# EAGLE board RMXU_V11 (EAGLE 6.2)
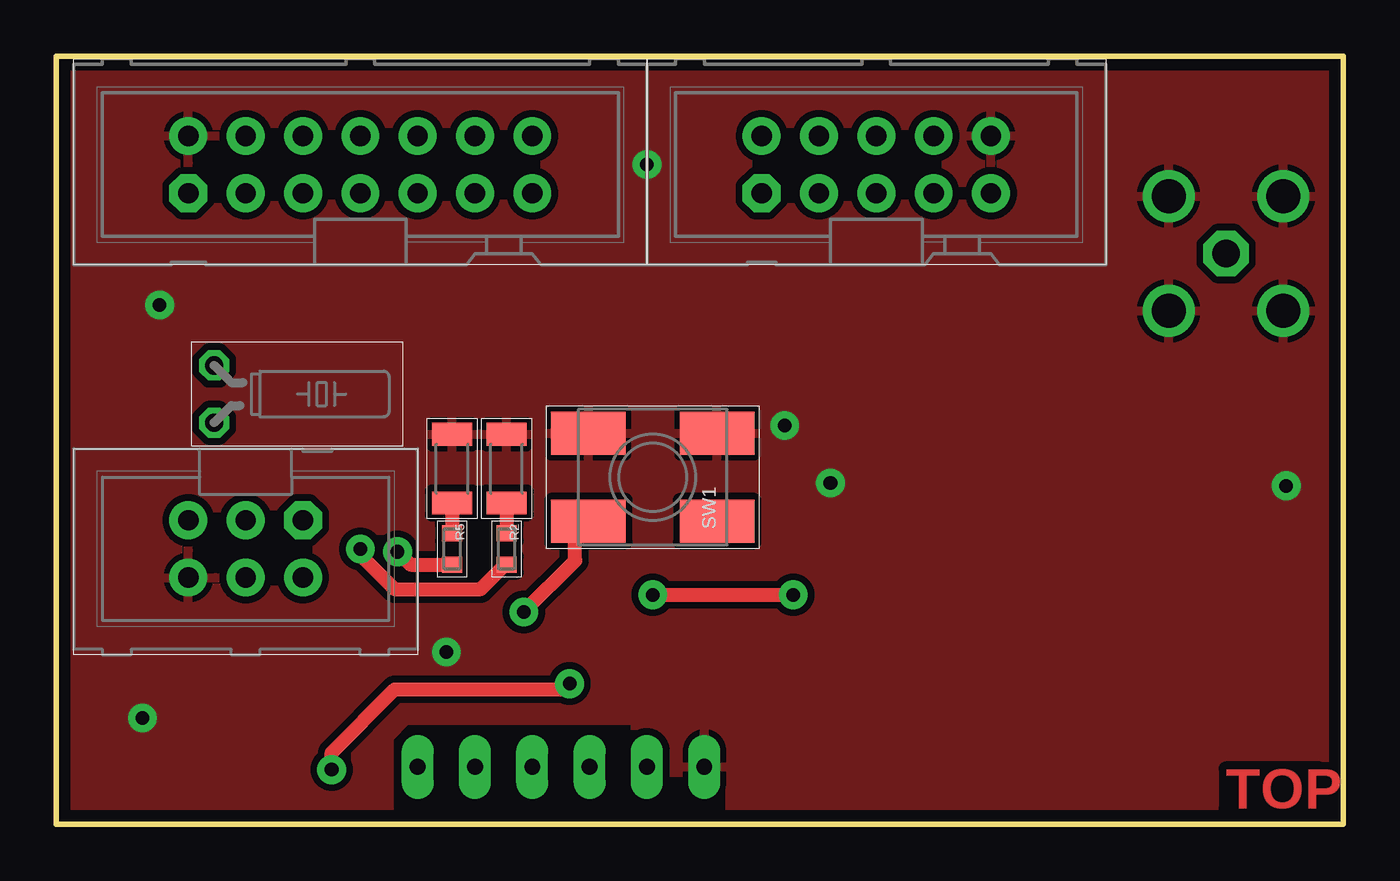
[diagram p0: board, top side]
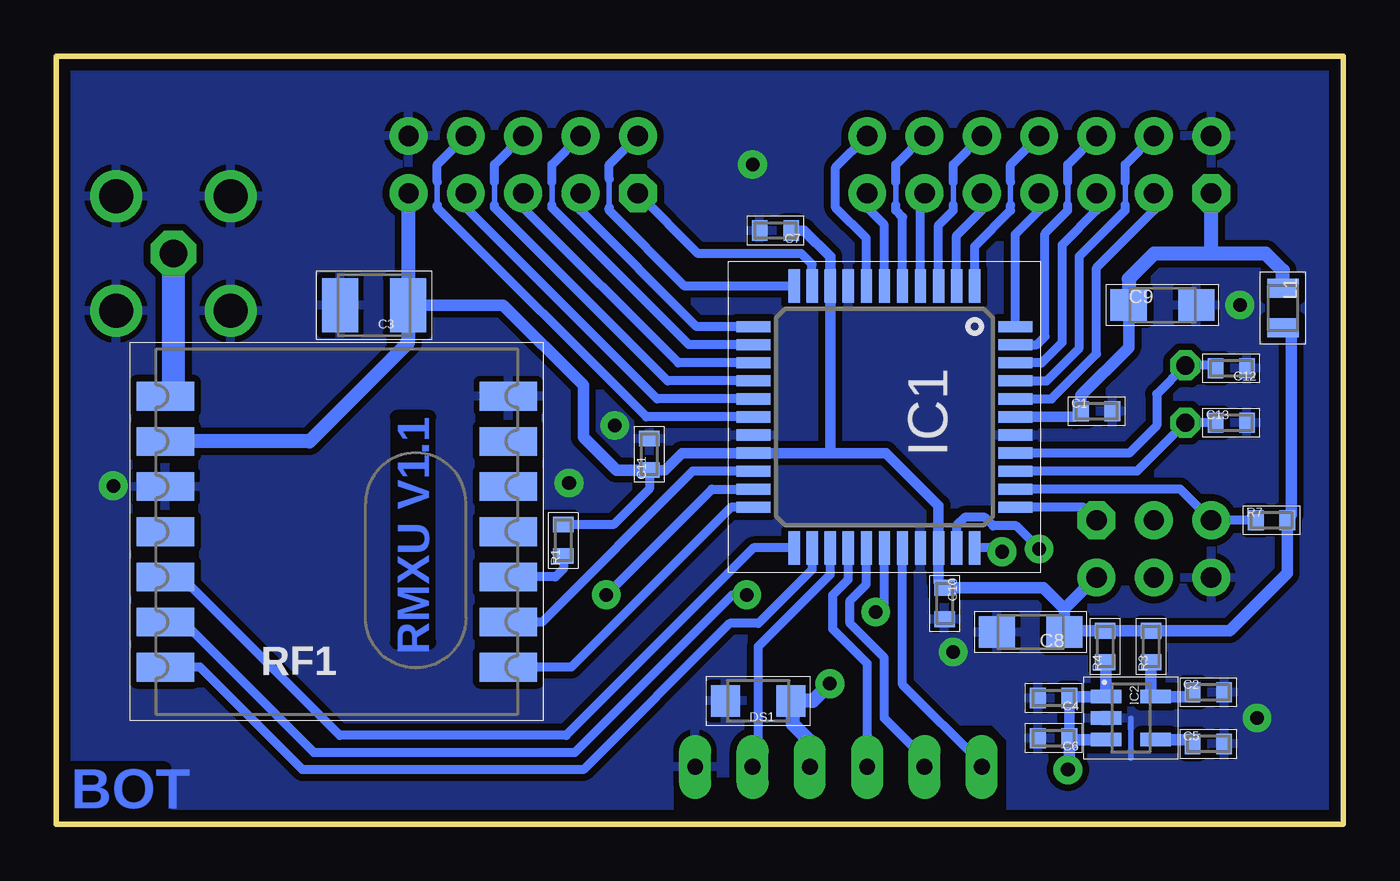
[diagram p1: board, bottom side, seen from below]

Size 57 x 34 mm. Coordinates in mm from the lower left corner, seen from the top.
Outline: 57,34 57,0 0,0 0,34 57,34
Copper layers (1+16): Top 0.035mm / dielectric 1.5mm / Bottom 0.035mm
Design rules: minimum track width 9mil, minimum drill 15mil, track to track 12mil, track to pad 12mil, pad to pad 10mil, via to via 12mil, smd to smd 10mil, copper to edge 20mil, drill to drill 8mil, minimum pad ring 10mil, minimum via ring 8mil, stop-mask expansion 4mil, vias tented up to drill 0mil, thermal gap 10mil

## Footprints (pad centres in the part's own frame; a part is rotated, then mirrored left to right if it is on the bottom)
0603 = smd 0.7 x 0.9: 1 -0.697,0; 2 0.697,0
SMC_B = smd 1.6 x 2.4: + -1.5,0; - 1.5,0
SMC_A = smd 1.6 x 1.4: + -1.5,0; - 1.5,0
SMF = smd 1.3 x 1.4: A 1.45,0; C -1.45,0
TQFP44 = smd 1.5 x 0.5: 1 -5.8,4; 2 -5.8,3.2; 3 -5.8,2.4; 4 -5.8,1.6; 5 -5.8,0.8; 6 -5.8,0; 7 -5.8,-0.8; 8 -5.8,-1.6; 9 -5.8,-2.4; 10 -5.8,-3.2; 11 -5.8,-4; 23 5.8,-4; 24 5.8,-3.2; 25 5.8,-2.4; 26 5.8,-1.6; 27 5.8,-0.8; 28 5.8,0; 29 5.8,0.8; 30 5.8,1.6; 31 5.8,2.4; 32 5.8,3.2; 33 5.8,4 | smd 0.5 x 1.5: 12 -4,-5.8; 13 -3.2,-5.8; 14 -2.4,-5.8; 15 -1.6,-5.8; 16 -0.8,-5.8; 17 0,-5.8; 18 0.8,-5.8; 19 1.6,-5.8; 20 2.4,-5.8; 21 3.2,-5.8; 22 4,-5.8; 34 4,5.8; 35 3.2,5.8; 36 2.4,5.8; 37 1.6,5.8; 38 0.8,5.8; 39 0,5.8; 40 -0.8,5.8; 41 -1.6,5.8; 42 -2.4,5.8; 43 -3.2,5.8; 44 -4,5.8
SOT23-5 = smd 0.6 x 1.35: 1 -0.95,-1.101; 2 0,-1.101; 3 0.95,-1.101; 4 0.95,1.101; 5 -0.951,1.101
0805 = smd 0.85 x 1.4: 1 -0.88,0; 2 0.88,0
1206 = smd 1.016 x 1.778: 1 -1.524,0; 2 1.524,0
TC26H = drill 0.813 octagon: 1 -1.27,0; 2 1.27,0
RFM12B = smd 2.54 x 1.27: /RES -7.6,-4; ANT 7.6,-6; CFIL -7.6,0; CLK -7.6,-2; FFS -7.6,2; GND 7.6,-2; GND@1 -7.6,-6; INT 7.6,0; IRQ -7.6,4; SCK 7.6,4; SDI 7.6,2; SDO -7.6,6; SEL 7.6,6; VDD 7.6,-4
ML6 = drill 0.9 pad 1.676 octagon: 1 -2.54,-1.27 | drill 0.9 pad 1.676: 2 -2.54,1.27; 3 0,-1.27; 4 0,1.27; 5 2.54,-1.27; 6 2.54,1.27
ML10 = drill 0.9 pad 1.676 octagon: 1 -5.08,-1.27 | drill 0.9 pad 1.676: 2 -5.08,1.27; 3 -2.54,-1.27; 4 -2.54,1.27; 5 0,-1.27; 6 0,1.27; 7 2.54,-1.27; 8 2.54,1.27; 9 5.08,-1.27; 10 5.08,1.27
ML14 = drill 0.9 pad 1.676 octagon: 1 -7.62,-1.27 | drill 0.9 pad 1.676: 2 -7.62,1.27; 3 -5.08,-1.27; 4 -5.08,1.27; 5 -2.54,-1.27; 6 -2.54,1.27; 7 0,-1.27; 8 0,1.27; 9 2.54,-1.27; 10 2.54,1.27; 11 5.08,-1.27; 12 5.08,1.27; 13 7.62,-1.27; 14 7.62,1.27
SPNO = smd 3.3 x 1.9: 1 -2.85,1.95; 2 2.85,1.95; 3 -2.85,-1.95; 4 2.85,-1.95
T2.0/1.2 = drill 1.2 pad 2 octagon: P$1 0,0
T2.3/1.5 = drill 1.5 pad 2.3: P$1 0,0
T1.4/0.7L = drill 0.7 pad 1.422 long: 1 0,0

## Placement (x,y rotation side)
C1  100n  [0603]  10.92,18.29 0 bottom
C2  1u  [0603]  5.97,5.84 0 bottom
C3  68u  [SMC_B]  42.93,22.99 180 bottom
C4  1u  [0603]  12.83,5.59 180 bottom
C5  10n  [0603]  5.97,3.56 0 bottom
C6  100n  [0603]  12.83,3.81 180 bottom
C7  100n  [0603]  25.15,26.29 180 bottom
C8  10u  [SMC_A]  13.84,8.51 180 bottom
C9  10u  [SMC_A]  8,22.99 0 bottom
C10  100n  [0603]  17.65,9.78 270 bottom
C11  100n  [0603]  30.73,16.38 90 bottom
C12  n.b.  [0603]  4.95,20.19 180 bottom
C13  n.b.  [0603]  4.95,17.78 0 bottom
DS1  SMF12A  [SMF]  25.91,5.46 180 bottom
IC1  XMEGA32A4U  [TQFP44]  20.32,18.03 270 bottom
IC2  LP2992IM5-3v3  [SOT23-5]  9.4,4.7 270 bottom
L1  10uH  [0805]  2.67,22.86 270 bottom
LED1  LEDG  [1206]  19.94,15.75 90 top
LED3  LEDR  [1206]  17.53,15.75 90 top
QR1  32,768  [TC26H]  6.99,19.05 270 top
R1  10k  [0603]  34.54,12.57 90 bottom
R2  1k  [0603]  19.94,12.19 270 top
R3  0R  [0603]  8.51,7.87 90 bottom
R4  n.b.  [0603]  10.54,7.87 90 bottom
R5  1k  [0603]  17.53,12.19 270 top
R7  10k  [0603]  3.17,13.46 0 bottom
RF1  RFM12B  [RFM12B]  44.58,12.95 180 bottom
SV1  PDI  [ML6]  8.38,12.19 180 top
SV2  PORTC  [ML10]  36.32,29.21 0 top
SV4  PORT A-B  [ML14]  13.46,29.21 0 top
SW1  SW1  [SPNO]  26.42,15.37 0 top
X2  ANT  [T2.0/1.2]  51.82,25.27 0 top
X3  GND  [T2.3/1.5]  49.28,27.81 0 top
X4  GND  [T2.3/1.5]  54.36,27.81 0 top
X5  GND  [T2.3/1.5]  49.28,22.73 0 top
X6  GND  [T2.3/1.5]  54.36,22.73 0 top
X7  DTR  [T1.4/0.7L]  16,2.54 90 top
X8  TX  [T1.4/0.7L]  18.54,2.54 90 top
X9  RX  [T1.4/0.7L]  21.08,2.54 90 top
X10  VCC  [T1.4/0.7L]  23.62,2.54 90 top
X11  CTS  [T1.4/0.7L]  26.16,2.54 90 top
X12  GND  [T1.4/0.7L]  28.7,2.54 90 top

## Library data of the parts
C1-C13 L1 R1-R5 R7 = RCL
DS1 = Diode
IC1 = atmel
IC2 = DCDC
LED1 LED3 = Optic
QR1 = QUARTZ
RF1 = RF
SV1 SV2 SV4 X2-X12 = Conn
SW1 = Relay_Switch

## Nets
+3V3: C3.+ C7.1 C8.+ C10.1 C11.1 IC1.9 IC1.19 IC1.31 L1.2 R1.2 R3.2 R4.2 R7.2 RF1.VDD SV1.2 SV2.9
CTS: IC1.25 X11.1
DTR: IC1.32 R2.2
GND: C1.2 C2.2 C3.- C4.2 C5.2 C6.2 C7.2 C8.- C9.- C10.2 C11.2 C12.1 C13.2 DS1.A IC1.8 IC1.18 IC1.30 IC1.38 IC2.2 LED1.2 LED3.2 RF1.GND RF1.GND@1 SV1.6 SV2.10 SV4.2 SW1.1 SW1.2 X3.P$1 X4.P$1 X5.P$1 X6.P$1 X12.1
N$1: IC1.10 SV2.1
N$2: IC1.11 SV2.2
N$3: IC1.12 SV2.3
N$4: IC1.29 X7.1
N$5: C12.2 IC1.37 QR1.1
N$6: IC1.13 SV2.4
N$7: IC1.14 SV2.5
N$8: IC1.15 SV2.6
N$9: IC1.16 SV2.7
N$10: IC1.17 SV2.8
N$11: RF1.ANT X2.P$1
N$12: IC1.33 R5.2
N$13: C5.1 IC2.4
N$14: IC1.28 SW1.3
N$15: LED1.1 R2.1
N$16: C13.1 IC1.36 QR1.2
N$17: C2.1 IC2.5 R3.1
N$18: R1.1 RF1.FFS
N$20: LED3.1 R5.1
N$21: C1.1 C9.+ IC1.39 L1.1 SV4.1
N$23: IC1.7 SV4.14
N$24: IC1.6 SV4.13
N$25: IC1.5 SV4.12
N$26: IC1.4 SV4.11
N$27: IC1.3 SV4.10
N$28: IC1.2 SV4.9
N$29: IC1.1 SV4.8
N$30: IC1.44 SV4.7
N$31: IC1.43 SV4.6
N$32: IC1.42 SV4.5
N$34: IC1.41 SV4.4
N$35: IC1.40 SV4.3
N$40: IC1.34 SV1.1
N$41: IC1.35 R7.1 SV1.5
RIRQ: IC1.20 RF1.IRQ
RSEL: IC1.24 RF1.SEL
RX: IC1.26 X9.1
RXDD0: IC1.22 RF1.SDO
TX: IC1.27 X8.1
TXDD0: IC1.23 RF1.SDI
VCC: C4.1 C6.1 DS1.C IC2.1 IC2.3 R4.1 X10.1
XCKD0: IC1.21 RF1.SCK

## Tracks (layer width: path | path; a pad name or v marks a point on that pad's centre or on a via)
+3V3
  Bottom 0.406: R1.2 32.32,13.27 30.73,14.86 C11.1
  Bottom 0.457: 22.73,16.43 20.25,16.43 17.92,14.11 IC1.31 17.92,10.74 C10.1 | 22.73,16.43 IC1.19 29.29,16.43 30.04,15.69 C11.1 | 22.73,16.43 22.72,16.45 IC1.9 22.72,25.13 23.88,26.29 C7.1
  Bottom 0.508: C3.+ 37.21,22.99 33.66,19.43 33.66,17.14 32.2,15.69 C11.1 | C10.1 13.27,10.48 12.34,9.55 | 12.34,9.55 C8.+ 12.28,8.57 R4.2 R3.2 5.02,8.57 2.48,11.11 R7.2 2.48,13.52 2.29,13.71 2.29,21.98 L1.2 | SV1.2 10.97,10.92 12.34,9.55
  Bottom 0.61: RF1.VDD 45.78,16.95 41.43,21.31 C3.+ 41.4,23.01 SV2.9
CTS
  Bottom 0.406: IC1.25 22.72,11.06 25.91,7.87 25.91,2.79 X11.1
DTR  (via drill 0.6 pad 1.27)
  Top 0.406: 19.88,11.49 R2.2
  Top 0.61: 19.88,11.49 18.8,10.41 14.99,10.41 13.46,11.94 v13.46,12.19
  Bottom 0.406: IC1.32 17.12,13.23 16.76,13.59 15.88,13.59 15.49,13.21 14.48,13.21 v13.46,12.19
GND  (via drill 0.6 pad 1.27)
  Bottom 0.24: 9.4,4.7 9.4,2.92
  other vias: 26.16,29.21 32.26,17.65 54.48,14.99 4.57,22.99 17.27,7.62 34.29,15.11 3.81,4.7
  pour Bottom (isolate 0.305): 0,34 57,34 57,0 29.84,0 29.84,2.29 25.65,2.29 25.65,4.57 15.49,4.57 14.73,3.81 14.73,0 0,0
  pour Top (isolate 0.305): 0,34 57,34 57,0 29.84,0 29.84,2.29 25.65,2.29 25.65,4.57 15.49,4.57 14.73,3.81 14.73,0 0,0
N$1
  Bottom 0.406: IC1.10 23.52,24.79 24,25.27 28.57,25.27 SV2.1
N$2
  Bottom 0.254: 32.51,27.3 32.51,28.57
  Bottom 0.406: IC1.11 29.17,23.83 32.51,27.18 32.51,27.3 | 32.51,28.57 32.51,29.21 SV2.2
N$3
  Bottom 0.406: IC1.12 28.64,22.03 33.78,27.18 SV2.3
N$4
  Bottom 0.406: IC1.29 19.52,6.18 16,2.67 X7.1
N$5
  Bottom 0.406: IC1.37 9.48,16.43 8.26,17.65 8.26,19.05 QR1.1 5.78,20.32 C12.2
N$6
  Bottom 0.254: 35.05,27.43 35.05,28.45
  Bottom 0.406: IC1.13 28.98,21.23 35.05,27.3 35.05,27.43 | 35.05,28.45 35.05,29.21 SV2.4
N$7
  Bottom 0.406: IC1.14 29.45,20.43 36.32,27.3 SV2.5
N$8
  Bottom 0.254: 37.59,27.43 37.59,28.45
  Bottom 0.406: IC1.15 29.92,19.63 37.59,27.3 37.59,27.43 | 37.59,28.45 37.59,29.21 SV2.6
N$9
  Bottom 0.406: IC1.16 30.39,18.83 38.86,27.3 SV2.7
N$10
  Bottom 0.254: 40.13,27.43 40.13,28.45
  Bottom 0.406: IC1.17 30.86,18.03 40.13,27.3 40.13,27.43 | 40.13,28.45 40.13,29.21 SV2.8
N$11
  Bottom 0.61: RF1.ANT 51.82,18.95
  Bottom 1.016: 51.82,18.95 X2.P$1
N$12  (via drill 0.6 pad 1.27)
  Top 0.61: R5.2 15.68,11.49 v15.11,12.06
  Bottom 0.406: IC1.33 15.28,12.23 v15.11,12.06
N$13
  Bottom 0.508: IC2.4 6.86,3.75 C5.1
N$14  (via drill 0.6 pad 1.27)
  Top 0.61: v20.7,9.4 22.98,11.67 22.98,12.83 SW1.3
  Bottom 0.406: IC1.28 20.32,9.78 v20.7,9.4
N$15
  Top 0.61: LED1.1 R2.1
N$16
  Bottom 0.406: IC1.36 9.13,15.63 8,16.76 QR1.2 C13.1
N$17
  Bottom 0.508: R3.1 8.51,5.86 IC2.5 6.86,5.65 C2.1
N$18
  Bottom 0.406: RF1.FFS 34.89,10.95 34.54,11.3 R1.1
N$20
  Top 0.61: LED3.1 R5.1
N$21
  Bottom 0.457: IC1.39 11.87,18.03 C1.1
  Bottom 0.508: C1.1 11.62,18.99 9.5,21.11 C9.+
  Bottom 0.61: C9.+ 9.5,24.15 8.38,25.27 5.84,25.27 | 5.84,25.27 SV4.1 | L1.1 2.67,24.51 3.43,25.27 5.84,25.27
N$23
  Bottom 0.406: IC1.7 21.12,25.95 22.48,27.3 22.48,29.08 SV4.14
N$24
  Bottom 0.406: IC1.6 20.32,26.54 21.08,27.3 SV4.13
N$25
  Bottom 0.254: 19.81,27.43 19.81,28.45
  Bottom 0.406: IC1.5 19.52,26.89 19.81,27.18 19.81,27.43 | 19.81,28.45 19.81,29.21 SV4.12
N$26
  Bottom 0.406: IC1.4 18.72,27.76 SV4.11
N$27
  Bottom 0.254: 17.27,27.43 17.27,28.45
  Bottom 0.406: IC1.3 17.92,26.53 17.27,27.18 17.27,27.43 | 17.27,28.45 17.27,29.21 SV4.10
N$28
  Bottom 0.406: IC1.2 17.12,26.06 16,27.18 SV4.9
N$29
  Bottom 0.254: 14.73,27.43 14.73,28.45
  Bottom 0.406: IC1.1 16.32,25.59 14.73,27.18 14.73,27.43 | 14.73,28.45 14.73,29.21 SV4.8
N$30
  Bottom 0.406: IC1.44 14.52,26.12 13.46,27.18 SV4.7
N$31
  Bottom 0.254: 12.19,27.43 12.19,28.45
  Bottom 0.406: IC1.43 13.56,21.23 13.21,21.59 13.21,26.16 12.19,27.18 12.19,27.43 | 12.19,28.45 12.19,29.21 SV4.6
N$32
  Bottom 0.406: IC1.42 13.35,20.43 12.45,21.34 12.45,25.65 10.92,27.18 SV4.5
N$34
  Bottom 0.254: 9.65,27.43 9.65,28.45
  Bottom 0.406: IC1.41 13.13,19.63 11.68,21.08 11.68,25.15 9.65,27.18 9.65,27.43 | 9.65,28.45 9.65,29.21 SV4.4
N$35
  Bottom 0.406: IC1.40 12.92,18.83 10.92,20.83 10.92,24.64 8.38,27.18 SV4.3
N$40
  Bottom 0.406: IC1.34 11.49,14.03 SV1.1
N$41
  Bottom 0.406: IC1.35 7.21,14.83 SV1.5 R7.1
RIRQ
  Bottom 0.406: RF1.IRQ 35.5,8.95 28.82,15.63 IC1.20
RSEL
  Bottom 0.406: IC1.24 23.52,11.28 25.91,8.89 27.18,8.89 33.66,2.41 46.1,2.41 50.64,6.95 RF1.SEL
RX
  Bottom 0.406: IC1.26 21.92,10.85 22.61,10.16 22.61,8.64 21.08,7.11 X9.1
RXDD0
  Bottom 0.406: IC1.22 27.11,14.03 34.19,6.95 RF1.SDO
TX
  Bottom 0.406: IC1.27 21.12,10.63 21.84,9.91 21.84,8.89 20.32,7.37 20.32,4.7 18.54,2.92 X8.1
TXDD0
  Bottom 0.406: IC1.23 26.12,12.23 34.42,3.94 44.45,3.94 51.47,10.95 RF1.SDI
VCC  (via drill 0.6 pad 1.27)
  Top 0.61: v22.73,6.22 22.48,5.97 14.99,5.97 12.19,3.17 v12.19,2.41
  Bottom 0.457: C6.1 C4.1
  Bottom 0.508: 24.26,5.46 24.38,5.46 DS1.C | C4.1 12.07,5.65 IC2.1 10.5,7.13 R4.1 | IC2.3 12.07,3.75 C6.1 12.13,2.48 v12.19,2.41
  Bottom 0.61: X10.1 23.62,3.68 24.38,4.45 24.38,5.46 23.5,5.46 v22.73,6.22
XCKD0  (via drill 0.6 pad 1.27)
  Top 0.61: v26.42,10.16 v32.64,10.16
  Bottom 0.406: IC1.21 27.96,14.83 v32.64,10.16 | v26.42,10.16 27.05,10.16 34.04,3.17 45.59,3.17 51.37,8.95 RF1.SCK

## Text on the board
Top: TOP
Bottom: RMXU V1.1 | BOT